# EAGLE board schema (EAGLE 6.5.0)
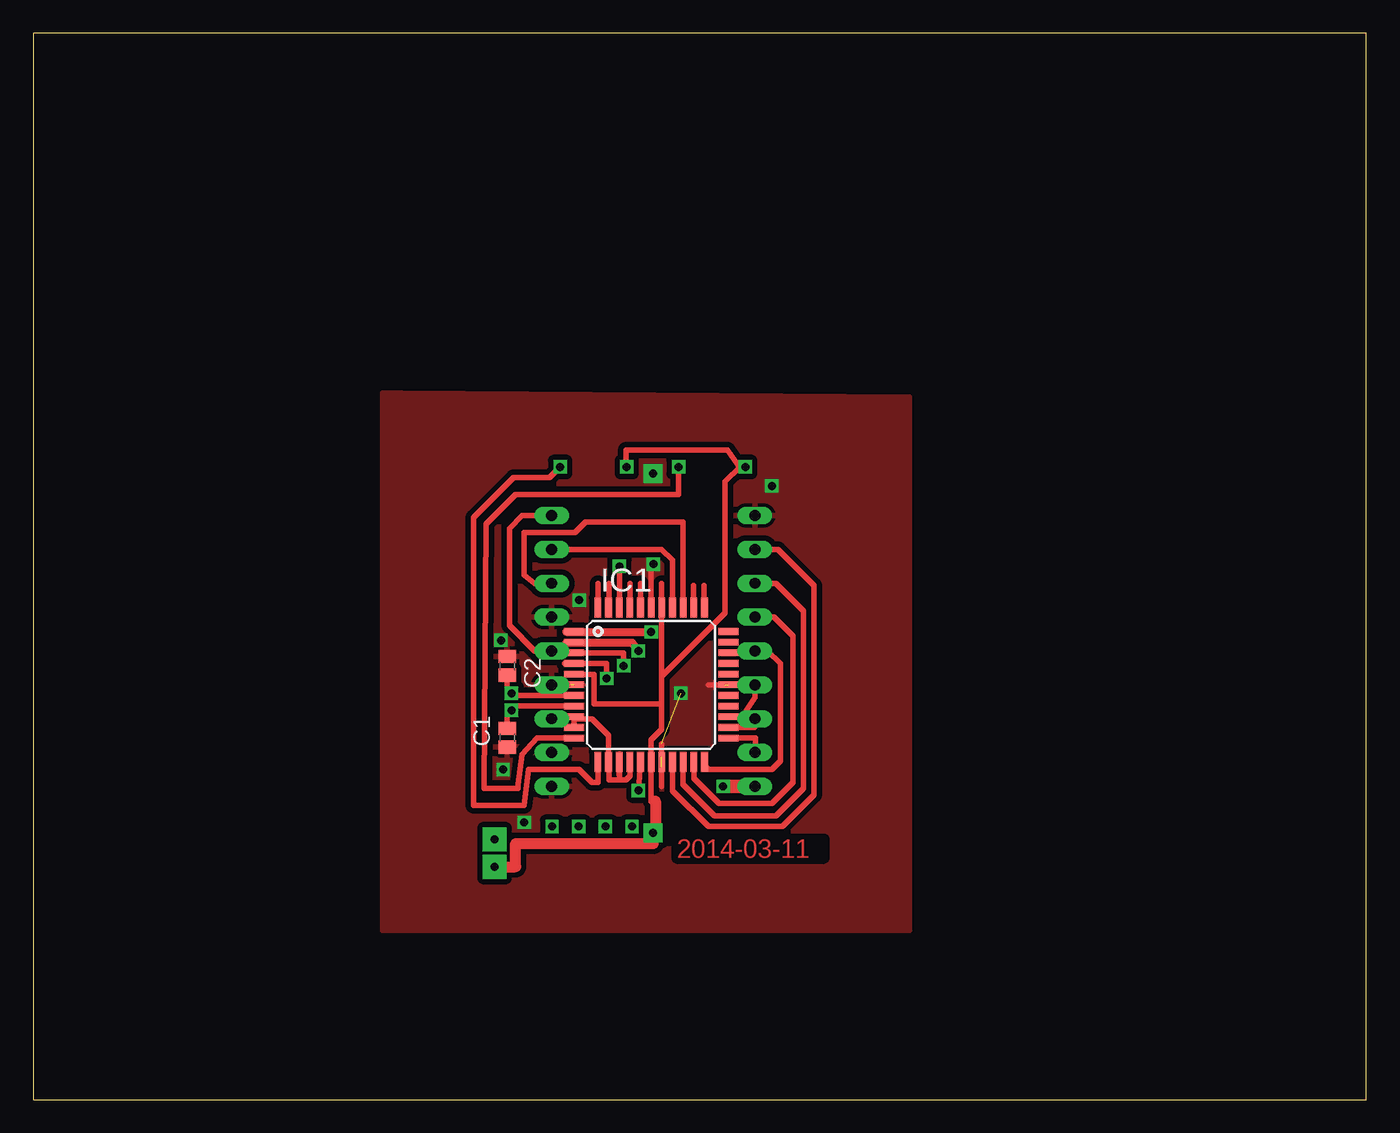
[diagram p0: board, top side]
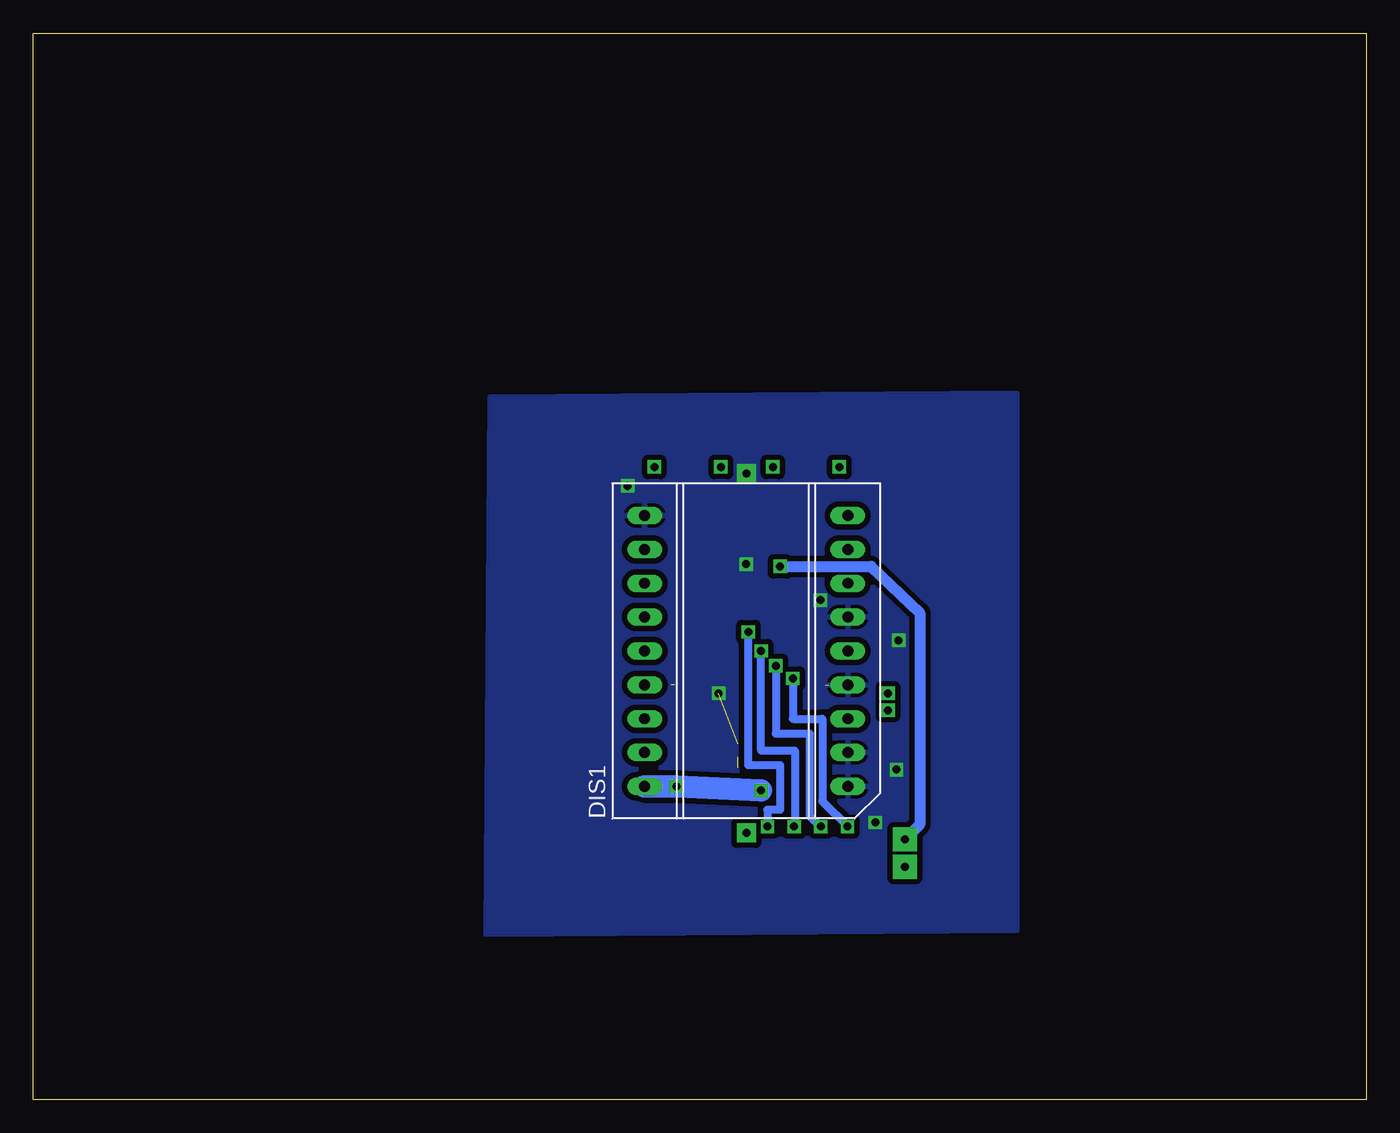
[diagram p1: board, bottom side, seen from below]

Size 100 x 80 mm. Coordinates in mm from the lower left corner, seen from the top.
Outline: 0,0 100,0 100,80 0,80 0,0
Copper layers (1*16): Top 0.035mm / dielectric 1.5mm / Bottom 0.035mm
Design rules "default": minimum track width 10mil, minimum drill 24mil, track to track 8mil, track to pad 8mil, pad to pad 8mil, via to via 8mil, smd to smd 8mil, copper to edge 40mil, drill to drill 8mil, minimum pad ring 10mil, minimum via ring 8mil, stop-mask expansion 4mil, vias tented up to drill 0mil, thermal gap 10mil

## Footprints (pad centres in the part's own frame; a part is rotated, then mirrored left to right if it is on the bottom)
C0504 = smd 1 x 1.3: 1 -0.7,0; 2 0.7,0
HDLX2416 = drill 0.813 long: 1 -10.16,-7.62; 2 -7.62,-7.62; 3 -5.08,-7.62; 4 -2.54,-7.62; 5 0,-7.62; 6 2.54,-7.62; 7 5.08,-7.62; 8 7.62,-7.62; 9 10.16,-7.62; 10 10.16,7.62; 11 7.62,7.62; 12 5.08,7.62; 13 2.54,7.62; 14 0,7.62; 15 -2.54,7.62; 16 -5.08,7.62; 17 -7.62,7.62; 18 -10.16,7.62
TQFP44 = smd 1.5 x 0.5: 1 -5.8,4; 2 -5.8,3.2; 3 -5.8,2.4; 4 -5.8,1.6; 5 -5.8,0.8; 6 -5.8,0; 7 -5.8,-0.8; 8 -5.8,-1.6; 9 -5.8,-2.4; 10 -5.8,-3.2; 11 -5.8,-4; 23 5.8,-4; 24 5.8,-3.2; 25 5.8,-2.4; 26 5.8,-1.6; 27 5.8,-0.8; 28 5.8,0; 29 5.8,0.8; 30 5.8,1.6; 31 5.8,2.4; 32 5.8,3.2; 33 5.8,4 | smd 0.5 x 1.5: 12 -4,-5.8; 13 -3.2,-5.8; 14 -2.4,-5.8; 15 -1.6,-5.8; 16 -0.8,-5.8; 17 0,-5.8; 18 0.8,-5.8; 19 1.6,-5.8; 20 2.4,-5.8; 21 3.2,-5.8; 22 4,-5.8; 34 4,5.8; 35 3.2,5.8; 36 2.4,5.8; 37 1.6,5.8; 38 0.8,5.8; 39 0,5.8; 40 -0.8,5.8; 41 -1.6,5.8; 42 -2.4,5.8; 43 -3.2,5.8; 44 -4,5.8

## Placement (x,y rotation side)
C1  [C0504]  35.56,27.15 90 top
C2  [C0504]  35.56,32.54 270 top
DIS1  HDLX2416  [HDLX2416]  46.51,33.66 90 bottom
IC1  MEGA16-A  [TQFP44]  46.35,31.11 0 top

## Library data of the parts
C1 C2 = eagle-ltspice; SPICEMODEL: NONE; SPICEPREFIX: C
DIS1 = display-hp; OC_FARNELL: unknown; OC_NEWARK: unknown
IC1 = atmel; MPN: ATMEGA16-16AU; OC_FARNELL: 9171134; OC_NEWARK: 96K6515

## Nets
AVCC: IC1.27
BL: DIS1.18 IC1.16
GND: C1.1 C2.1 DIS1.1 DIS1.2 DIS1.4 DIS1.6 DIS1.10 IC1.6 IC1.28
GND1: IC1.18
GND2: IC1.39
N$1: C2.2
N$2: C1.2
S$2: DIS1.3
S$6: DIS1.7 IC1.36
S$7: DIS1.8 IC1.37
S$8: DIS1.11 IC1.19
S$9: DIS1.12 IC1.20
S$10: DIS1.13 IC1.21
S$11: DIS1.14 IC1.22
S$12: DIS1.15 IC1.25
S$13: DIS1.16 IC1.24
S$14: DIS1.17 IC1.23
S$20: IC1.9 IC1.10 IC1.13 IC1.14 IC1.15
VCC: IC1.5
VCC1: IC1.17
VCC2: IC1.38
VDD: DIS1.5 DIS1.9

## Tracks (layer width: path | path; a pad name or v marks a point on that pad's centre or on a via)
BL  (via drill 0.6)
  Top 0.406: v45.4,23.18 IC1.16
  Top 1.016: DIS1.18 v51.75,23.5
  Bottom 1.676: DIS1.18 v51.75,23.5 v45.4,23.18
GND  (via drill 0.6, 0.6 pad 1.42)  (4 unrouted)
  Top 0.406: 40.32,31.11 DIS1.4 | 51.91,31.11 50.64,31.11 | 46.35,37.15 46.35,39.53 | 47.15,25.72 47.15,26.67 | 47.15,24.92 47.15,23.5
  other vias: 46.5,46.98 46.51,40.16 48.58,30.48 55.4,46.04 40.96,37.47 36.83,20.8 35.08,34.45 35.24,24.77
  pour Bottom (isolate 0.406): 26.19,12.7 26.19,53.02 65.72,52.7 66.04,12.38
  pour Top (isolate 0.406): 27.62,53.02 26.19,53.02 26.19,12.7 65.72,12.7 65.72,52.7
N$1
  Top 0.406: 36.04,30.32 | C2.2 35.56,30.8 35.72,30.48 35.88,30.48 36.04,30.32 | 40.48,30.32 36.04,30.32
N$2
  Top 0.406: C1.2 35.56,28.89 36.2,29.53 40.48,29.53
N$3  (via drill 0.6)
  other vias: 35.88,30.48
N$4  (via drill 0.6)
  other vias: 35.88,29.21
S$1  (via drill 0.6)
  other vias: 39.52,47.46
S$2
  Top 0.406: DIS1.3 38.89,28.89
S$3  (via drill 0.6)
  other vias: 44.52,47.46
S$4  (via drill 0.6)
  other vias: 48.41,47.46
S$5  (via drill 0.6)
  other vias: 53.41,47.46
S$6
  Top 0.406: IC1.36 48.76,41.57 48.74,43.34 41.43,43.34 40.64,42.55 36.83,42.55 36.83,39.37 37.62,38.73 DIS1.7
S$7
  Top 0.406: IC1.37 47.94,39.61 47.94,40.48 47.15,41.27 DIS1.8
S$8
  Top 0.406: IC1.19 47.95,23.16 50.64,20.48 56.2,20.48 58.58,22.86 58.58,38.58 55.88,41.27 DIS1.11
S$9
  Top 0.406: IC1.20 48.76,23.64 51.12,21.27 55.72,21.27 57.78,23.34 57.78,36.67 55.72,38.73 DIS1.12
S$10
  Top 0.406: IC1.21 49.55,24.11 51.44,22.23 55.4,22.23 56.99,23.81 56.99,34.77 55.56,36.2 DIS1.13
S$11
  Top 0.406: IC1.22 50.35,25.05 50.64,24.77 55.4,24.77 56.04,25.4 56.04,32.7 55.09,33.66 DIS1.14
S$12
  Top 0.406: IC1.25 53.16,28.71 54.13,30.16 DIS1.15
S$13
  Top 0.406: IC1.24 54.11,27.91 DIS1.16
S$14
  Top 0.406: IC1.23 54.16,27.11 DIS1.17
S$16
  Top 0.406: 40.64,27.15 37.78,27.15 36.67,25.88 36.35,23.65 36.35,23.34 33.81,23.34 33.97,43.18 36.2,45.4 48.42,45.4 48.42,46.99
S$17
  Top 0.406: 42.39,25.24 42.39,23.81 41.91,23.81 40.96,24.77 37.15,24.77 36.83,22.07 33.02,22.07 33.02,43.66 36.04,46.67 38.73,46.67 39.21,47.15
S$19  (via drill 0.6 pad 1.42)
  other vias: 46.5,20
S$20
  Top 0.406: IC1.15 44.76,24.28 44.45,23.97 43.97,23.97 | 43.97,23.97 43.97,25.93 IC1.14 43.95,24.62 43.97,23.97 | 43.97,23.97 43.18,23.97 43.18,25.93 IC1.13 43.16,27.33 41.91,28.57 40.58,28.57 IC1.10 IC1.9 39.42,28.73
S$21
  Top 0.406: 42.39,36.99 42.39,38.73
S$22
  Top 0.406: 44.45,47.94 44.45,48.74 52.07,48.74 52.86,47.62 53.02,47.47 51.91,46.35 51.91,36.51 47.15,31.75 | 47.15,38.73 47.15,31.75 | 47.15,29.69 47.15,27.78 46.35,26.99 46.35,22.38 46.67,22.38 | 40.16,31.91 42.07,31.91 42.07,29.69 47.15,29.69 | 47.15,29.69 47.15,31.75
  Top 0.813: 46.67,22.38 46.67,20
S$23
  Top 0.406: 43.18,37.15 43.18,38.73
S$24  (via drill 0.6, 0.6 pad 1.78)
  Top 0.406: 43.97,36.99 v43.97,40.01
  Bottom 0.813: v43.97,40.01 37.15,40.01 33.5,36.51 33.5,20.64 v34.61,19.53
S$25
  Top 0.406: 44.77,36.99 44.77,38.73
S$26
  Top 0.406: 45.56,36.99 45.56,38.73
S$28
  Top 0.406: 49.53,36.99 49.53,38.58
S$29
  Top 0.406: 50.32,36.99 50.32,38.58
S$31  (via drill 0.6 pad 1.78)
  Top 0.813: v34.61,17.46 36.2,17.46 36.2,19.21
S$32
  Bottom 0.61: 42.86,26.19 42.86,20.48
S$33
  Top 0.813: 36.35,19.21 46.51,19.21 46.51,20
S$34
  Top 0.61: 40.01,35.08 46.35,35.08
S$37  (via drill 0.6)
  other vias: 38.92,20.48
S$38  (via drill 0.6)
  other vias: 40.92,20.48
S$39  (via drill 0.6)
  other vias: 42.92,20.48
S$40  (via drill 0.6)
  other vias: 44.92,20.48
S$41
  Top 0.61: 40.01,34.29 44.93,34.29 45.4,33.66
S$43  (via drill 0.6)
  Top 0.406: 39.85,32.7 43.02,32.7 v43.02,31.59
  Bottom 0.61: v43.02,31.59 43.02,28.57 40.8,28.57 40.8,22.38 38.89,20.48
S$44  (via drill 0.6)
  Top 0.406: 40.01,33.5 44.29,33.5 v44.29,32.54
  Bottom 0.61: v44.29,32.54 44.29,27.46 41.75,27.46 41.75,21.27 40.96,20.48
S$45  (via drill 0.6)
  Bottom 0.61: v46.35,35.08 46.35,25.08 43.97,25.08 43.97,21.75 44.93,21.75 44.93,20.48
S$46  (via drill 0.6)
  Bottom 0.61: 43.02,26.19 45.4,26.19 v45.4,33.66
VDD
  Top 0.406: DIS1.5 37.62,33.66 35.72,35.56 35.72,42.86 36.67,43.81 DIS1.9

## Text on the board
Top: 2014-03-11
tValues: gnd | +min | +h | gnd | rst | sck | miso | mosi | vcc